# EAGLE board BPW5031 Arcade MegaWing (EAGLE 6.3)
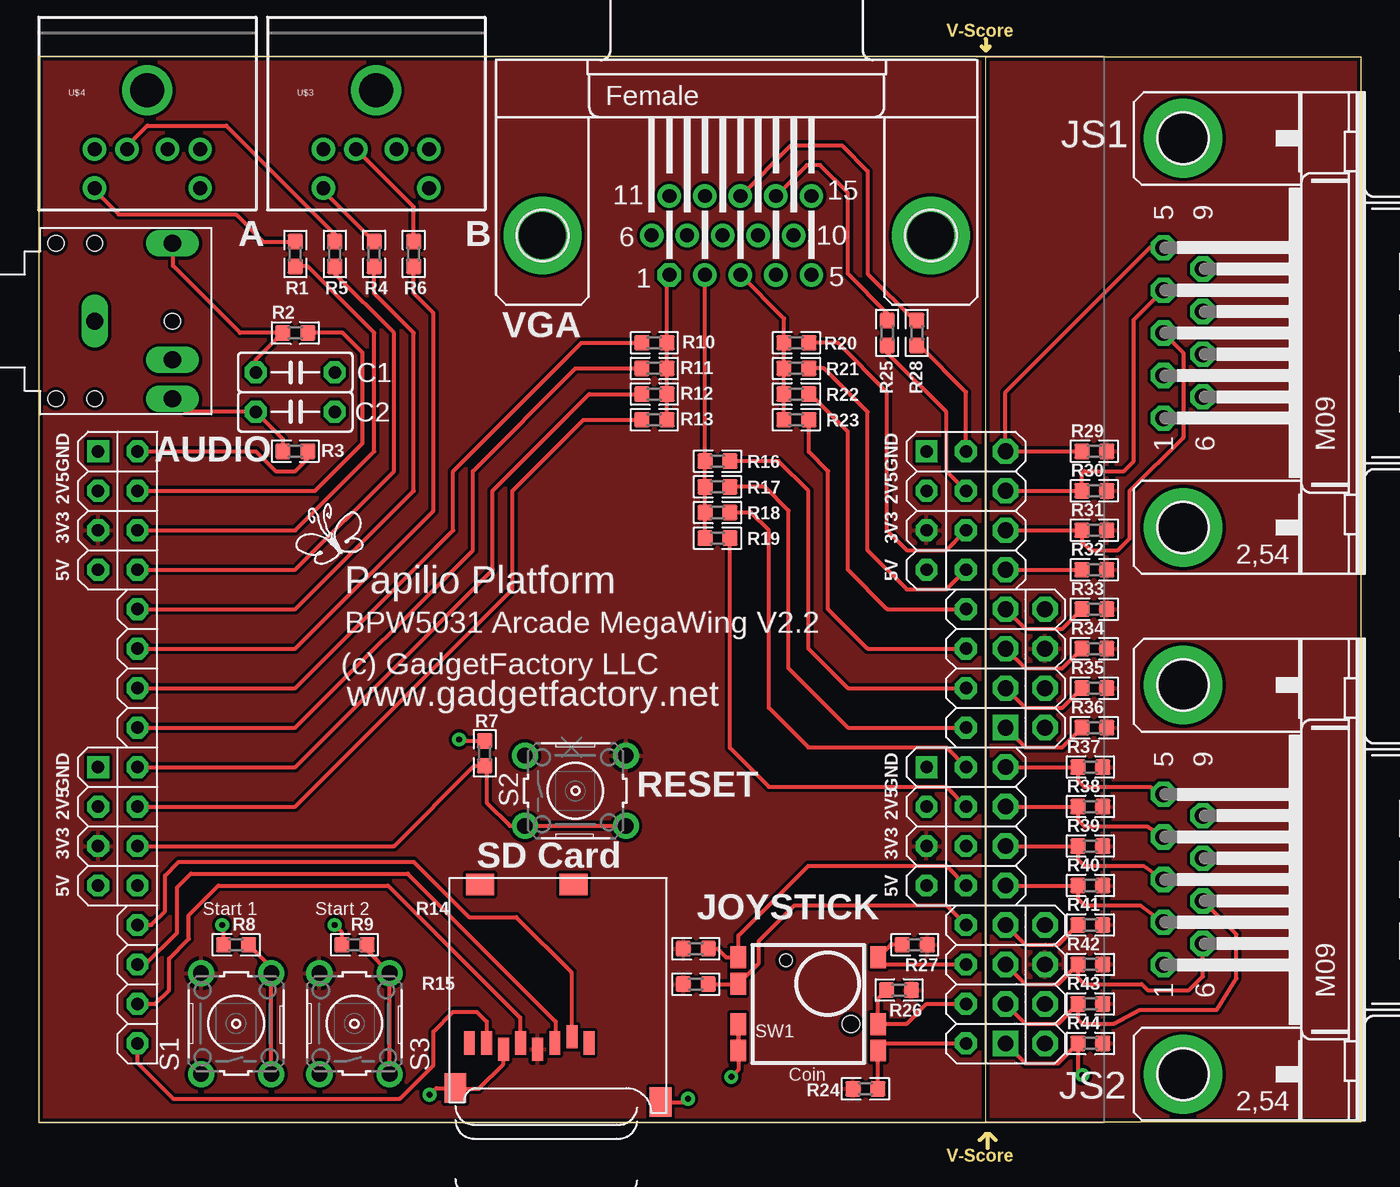
[diagram p0: board, top side]
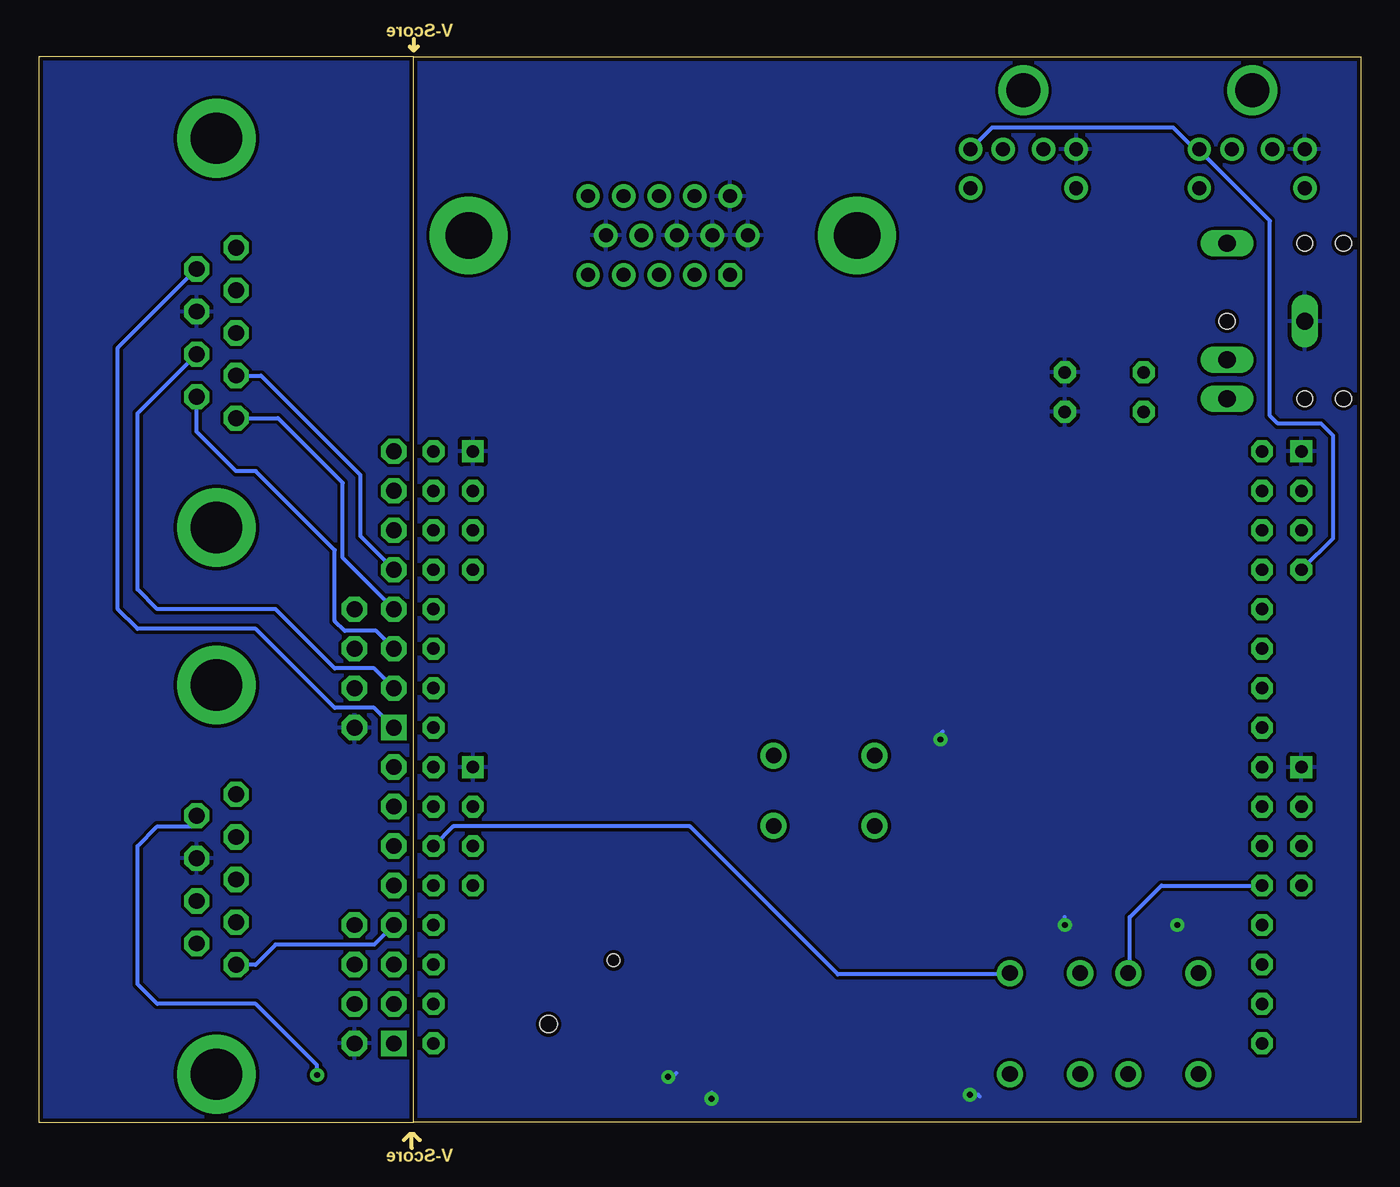
[diagram p1: board, bottom side, seen from below]

Size 85.09 x 71.37 mm. Coordinates in mm from the lower left corner, seen from the top.
Outline: 60.96,1.65 0,1.65 0,70.22 60.96,70.23
Outline: 60.96,70.23 85.09,70.23 85.09,1.65 60.96,1.65
Outline: 60.96,1.65 60.96,70.23
Outline: 61.09,0 61.09,0.89
Outline: 61.09,0.89 60.96,0.89 60.58,0.51
Outline: 61.09,0.89 61.21,0.89 61.59,0.51
Outline: 60.96,71.37 60.96,70.61
Outline: 60.96,70.61 61.21,70.87
Outline: 60.96,70.61 60.71,70.87
Copper layers (1*16): Top 0.035mm / dielectric 1.5mm / Bottom 0.035mm
Design rules "SparkFun_Derived_GoldePheonix_10mil": minimum track width 10mil, minimum drill 15mil, track to track 8mil, track to pad 8mil, pad to pad 8mil, via to via 8mil, smd to smd 8mil, copper to edge 10mil, drill to drill 8mil, minimum pad ring 12mil, minimum via ring 10mil, stop-mask expansion 4mil, vias tented up to drill 18mil, thermal gap 10mil

## Footprints (pad centres in the part's own frame; a part is rotated, then mirrored left to right if it is on the bottom)
WINGSIDE_8BIT_NOHOLES = drill 1.016 square: 0 19.05,1.27 | drill 1.016 octagon: 1 16.51,1.27; 2 13.97,1.27; 2V5@2 16.51,3.81; 3 11.43,1.27; 3V3@2 13.97,3.81; 4 8.89,1.27; 5 6.35,1.27; 5V@2 11.43,3.81; 6 3.81,1.27; 7 1.27,1.27; GND@2 19.05,3.81
AUDJCK = drill 1.1 long: 1 -5,0; 2 -10,5; 3 -10,-5; 4 -10,2.5 | hole 1: -5,5; -5,-5; -2.5,5; -2.5,-5; -10,0
C050-025X075 = drill 0.813 octagon: 1 -2.54,0; 2 2.54,0
M09HP = drill 1.016 octagon: 1 -5.486,1.27; 2 -2.743,1.27; 3 0,1.27; 4 2.743,1.27; 5 5.486,1.27; 6 -4.115,-1.27; 7 -1.372,-1.27; 8 1.372,-1.27; 9 4.115,-1.27 | drill 3.302 pad 5.08: G1 -12.522,0; G2 12.522,0
0603 = smd 1 x 1: 1 -0.8,0; 2 0.8,0
B3F-10XX = drill 1 pad 1.676: 1 -3.251,2.261; 2 3.251,2.261; 3 -3.251,-2.261; 4 3.251,-2.261
TPA-5POS = smd 1 x 1.4: 1 -4.5,-3; 2 -4.5,-1.3; 3 4.5,-1.3; 4 4.5,-3; 5 4.5,3; 6 -4.5,1.3; 7 -4.5,3 | hole 0.8: -1.45,2.8 | hole 1.1: 2.75,-1.3
MEGAWING_HALF_NOHOLES_P1 = drill 0.8 octagon: A17 59.69,43.18; A18 59.69,40.64; A19 59.69,38.1; A20 59.69,35.56; A21 59.69,33.02; A22 59.69,30.48; A23 59.69,27.94; A24 59.69,25.4; A25 59.69,22.86; A26 59.69,20.32; A27 59.69,17.78; A28 59.69,15.24; A29 59.69,12.7; A30 59.69,10.16; A31 59.69,7.62; A32 59.69,5.08; A33 6.35,43.18; A34 6.35,40.64; A35 6.35,38.1; A36 6.35,35.56; A37 6.35,33.02; A38 6.35,30.48; A39 6.35,27.94; A40 6.35,25.4; A41 6.35,22.86; A42 6.35,20.32; A43 6.35,17.78; A44 6.35,15.24; A45 6.35,12.7; A46 6.35,10.16; A47 6.35,7.62; A48 6.35,5.08; W2_2V5 57.15,40.64; W2_2V5_3 57.15,20.32; W2_3V3 57.15,38.1; W2_3V3_3 57.15,17.78; W2_5V 57.15,35.56; W2_5V_3 57.15,15.24; W3_2V5 3.81,40.64; W3_2V5_2 3.81,20.32; W3_3V3 3.81,38.1; W3_3V3_2 3.81,17.78; W3_5V 3.81,35.56; W3_5V_2 3.81,15.24 | drill 0.8 square: W2_GND 57.15,43.18; W2_GND_3 57.15,22.86; W3_GND 3.81,43.18; W3_GND_2 3.81,22.86
MICROSD = smd 0.7 x 1.5: 1 9,-10.64; 2 7.9,-10.24; 3 6.8,-10.64; 4 5.7,-11.04; 5 4.6,-10.64; 6 3.5,-11.04; 7 2.4,-10.64; 8 1.3,-10.64 | smd 1.8 x 1.4: CD1 2,-0.44; CD2 8,-0.44 | smd 1.4 x 1.9: MT1 0.4,-13.54; MT2 13.6,-14.44
MINI-DIN6 = drill 0.9: 1 -1.3,-8.5; 2 1.3,-8.5; 3 -3.4,-8.5; 4 3.4,-8.5; 5 -3.4,-11; 6 3.4,-11 | drill 2.2: P$1 0,-4.7
HDF15H = drill 0.9 octagon: 1 4.329,2.54 | drill 0.9: 2 2.043,2.54; 3 -0.243,2.54; 4 -2.529,2.54; 5 -4.815,2.54; 6 5.472,0; 7 3.186,0; 8 0.9,0; 9 -1.386,0; 10 -3.672,0; 11 4.329,-2.54; 12 2.043,-2.54; 13 -0.243,-2.54; 14 -2.529,-2.54; 15 -4.815,-2.54 | drill 3 pad 5: P$1 -12.5,0; P$2 12.5,0

## Placement (x,y rotation side)
AH  WING8WING8_NOHOLES  [WINGSIDE_8BIT_NOHOLES]  60.96,46.1 270 top
AL  WING8WING8_NOHOLES  [WINGSIDE_8BIT_NOHOLES]  60.96,25.78 270 top
AUDIO1  AUDIOJACK  [AUDJCK]  -1.4,53.21 180 top
C1  4.7nF  [C050-025X075]  16.51,49.91 0 top
C2  4.7nF  [C050-025X075]  16.51,47.37 0 top
JS1  [M09HP]  73.66,52.45 90 top
JS2  [M09HP]  73.66,17.27 90 top
LOGO1  BUTTERFLY_LOGO  [BUTTERFLY_LOGO]  18.8,38.99 0 top
R1  390  [0603]  16.51,57.53 90 top
R2  3.3K  [0603]  16.51,52.45 0 top
R3  3.3K  [0603]  16.51,44.83 0 top
R4  390  [0603]  19.05,57.53 90 top
R5  390  [0603]  21.59,57.53 90 top
R6  390  [0603]  24.13,57.53 90 top
R7  47K  [0603]  28.7,25.4 270 top
R8  47K  [0603]  12.7,13.08 0 top
R9  47K  [0603]  20.32,13.08 0 top
R10  3.9K  [0603]  39.62,51.82 0 top
R11  2K  [0603]  39.62,50.17 0 top
R12  1K  [0603]  39.62,48.51 0 top
R13  510  [0603]  39.62,46.86 0 top
R14  47K  [0603]  42.29,12.83 0 top
R15  47K  [0603]  42.29,10.54 0 top
R16  3.9K  [0603]  43.69,44.2 180 top
R17  2K  [0603]  43.69,42.55 180 top
R18  1K  [0603]  43.69,40.89 180 top
R19  510  [0603]  43.69,39.24 180 top
R20  3.9K  [0603]  48.77,51.82 180 top
R21  2K  [0603]  48.77,50.17 180 top
R22  1K  [0603]  48.77,48.51 180 top
R23  510  [0603]  48.77,46.86 180 top
R24  47K  [0603]  53.21,3.81 0 top
R25  82.5  [0603]  54.61,52.45 90 top
R26  47K  [0603]  55.37,10.16 180 top
R27  47K  [0603]  56.39,13.08 180 top
R28  82.5  [0603]  56.52,52.45 90 top
R29  47K  [0603]  67.94,44.83 0 top
R30  47K  [0603]  67.94,42.29 0 top
R31  47K  [0603]  67.94,39.75 0 top
R32  47K  [0603]  67.94,37.21 0 top
R33  47K  [0603]  67.94,34.67 0 top
R34  47K  [0603]  67.94,32.13 0 top
R35  47K  [0603]  67.94,29.59 0 top
R36  47K  [0603]  67.94,27.05 0 top
R37  47K  [0603]  67.69,24.51 0 top
R38  47K  [0603]  67.69,21.97 0 top
R39  47K  [0603]  67.69,19.43 0 top
R40  47K  [0603]  67.69,16.89 0 top
R41  47K  [0603]  67.69,14.35 0 top
R42  47K  [0603]  67.69,11.81 0 top
R43  47K  [0603]  67.69,9.27 0 top
R44  47K  [0603]  67.69,6.73 0 top
S1  [B3F-10XX]  12.7,8 90 top
S2  [B3F-10XX]  34.54,22.99 0 top
S3  [B3F-10XX]  20.32,8 90 top
SW1  TPA-5POS  [TPA-5POS]  49.53,9.27 0 top
U$1  MEGAWING_HALF_P1  [MEGAWING_HALF_NOHOLES_P1]  0,1.65 0 top
U$2  MICROSD  [MICROSD]  26.42,17.4 0 top
U$3  MINI-DIN6PTH  [MINI-DIN6]  21.72,72.77 0 top
U$4  MINI-DIN6PTH  [MINI-DIN6]  6.99,72.77 0 top
X1  [HDF15H]  44.92,58.72 180 top

## Library data of the parts
AH AL U$1 = Papilio
AUDIO1 R1-R44 SW1 = GadgetFactory
C1 C2 = resistor
JS1 JS2 = con-subd
LOGO1 = GadgetFactory_Pub
S1-S3 = opto
U$2 = adafruit
U$3 U$4 = SparkFun-Connectors
X1 = GadgetFactory; OC_FARNELL: unknown; OC_NEWARK: unknown

## Nets
3V3: R14.1 R15.1 R24.1 R26.1 R27.1 S1.2 S2.2 S3.2 U$1.W2_3V3 U$1.W2_3V3_3 U$1.W3_3V3 U$1.W3_3V3_2 U$2.4
5V0: U$1.W3_5V U$3.4 U$4.4
AUDIO+: R3.2 U$1.A33
AUDIO-: R2.2 U$1.A34
BLUE: R20.2 R21.2 R22.2 R23.2 X1.3
BLUE0: R20.1 U$1.A19
BLUE1: R21.1 U$1.A20
BLUE2: R22.1 U$1.A21
BLUE3: R23.1 U$1.A22
GND: AUDIO1.1 C1.2 C2.2 R7.1 R8.1 R9.1 SW1.1 SW1.2 U$1.W2_GND U$1.W2_GND_3 U$1.W3_GND U$1.W3_GND_2 U$2.6 U$2.MT1 U$2.MT2 U$3.3 U$4.3 X1.6 X1.7 X1.8 X1.10 X1.11
GREEN: R16.2 R17.2 R18.2 R19.2 X1.2
GREEN0: R16.1 U$1.A23
GREEN1: R17.1 U$1.A24
GREEN2: R18.1 U$1.A25
GREEN3: R19.1 U$1.A26
HORIZONTAL_SYNC: R28.1 U$1.A17
JOY_3V3: AH.3V3@2 AL.3V3@2 R29.2 R30.2 R31.2 R32.2 R33.2 R34.2 R35.2 R36.2 R37.2 R38.2 R39.2 R40.2 R41.2 R42.2 R43.2 R44.2
JOY_DOWN: R24.2 SW1.4 U$1.A32
JOY_FIRE1: R8.2 S1.3 S1.4 U$1.A44
JOY_FIRE2: R9.2 S3.3 S3.4 U$1.A27
JOY_GND: AH.GND@2 AL.GND@2 JS1.8 JS2.8
JOY_LEFT: R14.2 SW1.7 U$1.A28
JOY_RIGHT: R15.2 SW1.6 U$1.A29
JOY_SEL: R27.2 SW1.5 U$1.A30
JOY_UP: R26.2 SW1.3 U$1.A31
N$1: AH.3 JS1.1 R33.1
N$2: AH.4 JS1.2 R32.1
N$3: AH.5 JS1.3 R31.1
N$4: R28.2 X1.13
N$5: R25.2 X1.14
N$6: AH.6 JS1.4 R30.1
N$7: AH.7 JS1.5 R29.1
N$8: AH.2 JS1.6 R34.1
N$9: AH.1 JS1.7 R35.1
N$10: AUDIO1.2 C2.1 R3.1
N$11: AUDIO1.3 C1.1 R2.1
N$12: R6.2 U$3.1
N$13: R5.2 U$3.5
N$14: R4.2 U$4.1
N$15: R1.2 U$4.5
N$16: AL.3 JS2.1 R41.1
N$17: AL.4 JS2.2 R40.1
N$18: AL.5 JS2.3 R39.1
N$19: AL.6 JS2.4 R38.1
N$20: AL.7 JS2.5 R37.1
N$21: AL.2 JS2.6 R42.1
N$22: AL.1 JS2.7 R43.1
N$23: AL.0 JS2.9 R44.1
N$24: AH.0 JS1.9 R36.1
PS2CLK1: R5.1 U$1.A37
PS2CLK2: R1.1 U$1.A35
PS2DAT1: R6.1 U$1.A38
PS2DAT2: R4.1 U$1.A36
RED: R10.2 R11.2 R12.2 R13.2 X1.1
RED0: R10.1 U$1.A39
RED1: R11.1 U$1.A40
RED2: R12.1 U$1.A41
RED3: R13.1 U$1.A42
RESET: R7.2 S2.3 S2.4 U$1.A43
SD_!CS: U$1.A45 U$2.2
SD_DI: U$1.A46 U$2.3
SD_DO: U$1.A48 U$2.7
SD_SCK: U$1.A47 U$2.5
VERTICAL_SYNC: R25.1 U$1.A18

## Tracks (layer width: path | path; a pad name or v marks a point on that pad's centre or on a via)
3V3
  pour Top: 0,1.52 60.96,1.52 60.96,70.23 0,70.23
5V0
  Bottom 0.254: U$1.W3_5V 1.78,39.24 1.78,45.85 2.54,46.61 5.33,46.61 5.84,47.12 5.84,59.65 10.38,64.2 U$4.4 10.68,64.27 12.06,65.66 23.73,65.66 U$3.4
AUDIO+
  Top 0.254: R3.2 17.31,44.36 16.51,43.56 15.24,43.56 13.97,44.83 U$1.A33
AUDIO-
  Top 0.254: R2.2 19.56,52.45 20.83,51.18 20.83,45.34 17.78,42.29 U$1.A34
BLUE
  Top 0.254: R23.2 R22.2 R21.2 R20.2 47.97,53.38 X1.3
BLUE0
  Top 0.254: R20.1 51.44,51.82 54.61,48.64 54.61,39.75 55.88,38.48 58.42,38.48 U$1.A19
BLUE1
  Top 0.254: R21.1 50.55,50.17 53.34,47.37 53.34,38.48 55.88,35.94 58.42,35.94 U$1.A20
BLUE2
  Top 0.254: R22.1 49.66,48.51 52.07,46.1 52.07,37.21 54.61,34.67 U$1.A21
BLUE3
  Top 0.254: R23.1 49.57,44.79 50.8,43.56 50.8,34.67 53.34,32.13 U$1.A22
GND  (via drill 0.38)
  Top 0.254: SW1.1 SW1.2 45.03,5.03 v44.58,4.57 | R7.1 27.14,26.2 v27.05,26.29 | U$2.MT2 41.57,2.96 v41.78,3.17 | v25.15,3.43 25.58,3.86 U$2.MT1 26.86,3.81 28.32,3.81 29.92,5.41 U$2.6 | R9.1 19.52,13.88 v19.05,14.35 | R8.1 11.9,14.26 v11.81,14.35
  Bottom 0.254: v44.58,4.57 44.32,4.57 44.07,4.83 | v27.05,26.29 27.05,26.67 26.92,26.8 | v41.78,3.17 41.78,3.56 | v25.15,3.43 24.64,3.43 24.51,3.3 | v19.05,14.35 19.05,14.86 | v11.81,14.35 11.81,14.48 11.68,14.61
  pour Bottom: 0,1.52 60.96,1.52 60.96,70.23 0,70.23
GREEN
  Top 0.254: R19.2 R18.2 R17.2 R16.2 X1.2
GREEN0
  Top 0.254: R16.1 47.62,44.2 49.53,42.29 49.53,32.13 52.07,29.59 U$1.A23
GREEN1
  Top 0.254: R17.1 46.74,42.55 48.26,41.02 48.26,30.86 52.07,27.05 U$1.A24
GREEN2
  Top 0.254: R18.1 45.85,40.89 46.99,39.75 46.99,28.32 49.53,25.78 58.42,25.78 U$1.A25
GREEN3
  Top 0.254: R19.1 44.49,25.74 46.99,23.24 58.42,23.24 U$1.A26
HORIZONTAL_SYNC
  Top 0.254: R28.1 56.68,51.65 59.69,48.64 U$1.A17
JOY_3V3
  pour Top: 60.96,70.23 85.09,70.23 85.09,1.65 60.96,1.65
JOY_DOWN
  Top 0.254: U$1.A32 54.49,6.73 SW1.4 54.01,6.25 R24.2
JOY_FIRE1
  Top 0.254: S1.3 S1.4 14.96,11.62 R8.2
  Bottom 0.254: U$1.A44 12.83,16.89 14.86,14.86 14.86,11.35 S1.4
JOY_FIRE2
  Top 0.254: R9.2 21.12,12.71 S3.4 S3.3
  Bottom 0.254: U$1.A27 58.42,20.7 43.18,20.7 33.66,11.18 22.66,11.18 S3.4
JOY_GND
  pour Bottom: 60.96,70.23 85.09,70.23 85.09,1.65 60.96,1.65
JOY_LEFT
  Top 0.254: R14.2 43.69,12.83 44.24,12.27 SW1.7 45.03,13.66 49.53,18.16 58.42,18.16 U$1.A28
JOY_RIGHT
  Top 0.254: R15.2 45,10.54 SW1.6 46.35,11.9 46.35,13.33 48.64,15.62 58.42,15.62 U$1.A29
JOY_SEL
  Top 0.254: U$1.A30 54.49,11.81 SW1.5 54.84,13.08 R27.2
JOY_UP
  Top 0.254: U$1.A31 57.15,9.27 55.88,8 54.06,8 SW1.3 54.03,9.62 R26.2
N$1
  Top 0.254: AH.3 63.5,33.4 65.88,33.4 R33.1
  Bottom 0.254: AH.3 65.53,37.97 65.53,42.8 69.7,46.97 JS1.1
N$2
  Top 0.254: AH.4 R32.1
  Bottom 0.254: AH.4 64.39,39.37 64.39,43.31 70.79,49.71 JS1.2
N$3
  Top 0.254: AH.5 R31.1 67.14,39.03 67.69,38.48 69.47,38.48 70.23,39.24 70.23,42.29 73.66,45.72 73.66,51.18 JS1.3
N$4
  Top 0.254: R28.2 56.35,53.25 53.34,56.26 53.34,62.87 51.69,64.52 48.42,64.52 X1.13
N$5
  Top 0.254: R25.2 54.61,53.72 52.07,56.26 52.07,61.47 50.29,63.25 49.44,63.25 X1.14
N$6
  Top 0.254: AH.6 R30.1 67.14,43.4 67.31,43.56 69.85,43.56 70.48,44.2 70.48,53.29 JS1.4
N$7
  Top 0.254: R29.1 AH.7 62.23,48.64 67.31,53.72 67.72,54.13 71.53,57.94 JS1.5
N$8
  Top 0.254: AH.2 63.5,30.86 65.88,30.86 R34.1
  Bottom 0.254: AH.2 63.37,33.27 65.41,33.27 66.04,33.91 66.04,38.48 71.12,43.56 72.39,43.56 74.93,46.1 JS1.6
N$9
  Top 0.254: AH.1 63.5,28.32 65.88,28.32 R35.1
  Bottom 0.254: AH.1 63.5,30.86 66.04,30.86 69.85,34.67 77.47,34.67 78.74,35.94 78.74,47.27 JS1.7
N$10
  Top 0.254: R3.1 15.71,45.63 C2.1 9.45,47.37 AUDIO1.2
N$11
  Top 0.254: C1.1 13.97,50.71 R2.1 12.95,52.45 8.64,56.77 8.64,58.18 AUDIO1.3
N$12
  Top 0.254: R6.2 24.13,60.57 U$3.1
N$13
  Top 0.254: 21.59,58.41 R5.2 18.32,61.6 U$3.5
N$14
  Top 0.254: R4.2 19.05,58.8 12.06,65.79 6.99,65.79 5.68,64.49 U$4.1
N$15
  Top 0.254: R1.2 14.44,58.33 12.7,60.07 5.14,60.07 3.58,61.63 U$4.5
N$16
  Top 0.254: AL.3 63.5,13.08 65.62,13.08 R41.1
  Bottom 0.254: JS2.1 71.14,11.79 69.85,13.08 63.5,13.08 AL.3
N$17
  Top 0.254: AL.4 R40.1 66.89,16.04 67.31,15.62 70.92,15.62 JS2.2
N$18
  Top 0.254: AL.5 R39.1 66.89,18.58 67.31,18.16 71.12,18.16 JS2.3
N$19
  Top 0.254: AL.6 R38.1 66.89,21.12 67.31,20.7 71.32,20.7 JS2.4
N$20
  Top 0.254: AL.7 R37.1 66.89,23.66 67.31,23.24 71.53,23.24 JS2.5
N$21
  Top 0.254: AL.2 63.5,10.54 65.62,10.54 R42.1 66.89,10.96 67.31,10.54 70.99,10.54 71.37,10.16 74.04,10.16 74.93,11.05 JS2.6
N$22
  Top 0.254: AL.1 63.5,8 65.62,8 R43.1 66.89,8.29 67.18,8 69.22,8 70.87,8.89 75.82,8.89 77.09,10.92 77.09,13.74 JS2.7
N$23  (via drill 0.38)
  Top 0.254: AL.0 63.5,5.46 65.62,5.46 R44.1 66.89,4.99 v67.18,4.7
  Bottom 0.254: v67.18,4.7 67.18,5.33 71.12,9.27 77.47,9.27 78.74,10.54 78.74,19.43 77.47,20.7 75.23,20.7 JS2.9
N$24
  Top 0.254: AH.0 63.5,25.78 65.88,25.78 R36.1
  Bottom 0.254: AH.0 63.5,28.32 66.04,28.32 71.12,33.4 78.74,33.4 80.01,34.67 80.01,51.49 JS1.9
PS2CLK1
  Top 0.254: R5.1 21.59,54.99 24.13,52.45 24.13,42.29 16.51,34.67 U$1.A37
PS2CLK2
  Top 0.254: R1.1 17.31,56.73 21.59,52.45 21.59,44.83 16.51,39.75 U$1.A35
PS2DAT1
  Top 0.254: R6.1 24.13,54.99 25.4,53.72 25.4,41.02 16.51,32.13 U$1.A38
PS2DAT2
  Top 0.254: R4.1 19.05,56.26 22.86,52.45 22.86,43.56 16.51,37.21 U$1.A36
RED
  Top 0.254: R13.2 R12.2 R11.2 R10.2 40.42,56.01 X1.1
RED0
  Top 0.254: R10.1 34.92,51.82 26.67,43.56 26.67,39.75 16.51,29.59 U$1.A39
RED1
  Top 0.254: R11.1 34.54,50.17 27.94,43.56 27.94,38.48 16.51,27.05 U$1.A40
RED2
  Top 0.254: R12.1 35.43,48.51 29.21,42.29 29.21,37.21 16.51,24.51 U$1.A41
RED3
  Top 0.254: R13.1 35.05,46.86 30.48,42.29 30.48,35.94 16.51,21.97 U$1.A42
RESET
  Top 0.254: S2.4 S2.3 30.33,20.73 28.83,22.23 28.83,24.47 R7.2 28.03,24.6 22.86,19.43 U$1.A43
SD_!CS
  Top 0.254: U$1.A45 7.24,14.35 8.13,15.24 8.13,17.53 9.02,18.41 24.13,18.41 27.69,14.86 30.73,14.86 34.29,11.3 34.29,7.18 U$2.2
SD_DI
  Top 0.254: U$1.A46 6.86,11.81 8.89,13.84 8.89,16.76 9.78,17.65 23.75,17.65 33.27,8.13 33.27,6.82 U$2.3
SD_DO
  Top 0.254: U$1.A48 6.35,5.46 8.64,3.17 23.24,3.17 25.4,5.33 25.4,7.49 26.67,8.76 28.19,8.76 28.83,8.13 28.83,6.77 U$2.7
SD_SCK
  Top 0.254: U$1.A47 7.49,9.27 8.38,10.16 8.38,12.19 9.65,13.46 9.65,14.99 11.56,16.89 22.48,16.89 30.99,8.38 30.99,6.79 U$2.5
VERTICAL_SYNC
  Top 0.254: R25.1 54.61,51.18 58.42,47.37 58.42,43.56 U$1.A18

## Text on the board
Dimension: V-Score | V-Score
tPlace: A | B | VGA | AUDIO | Papilio Platform | BPW5031 Arcade MegaWing V2.2 | (c) GadgetFactory LLC | www.gadgetfactory.net | RESET | SD Card | JOYSTICK
tNames: Start 1 | Start 2 | Coin